# Altium PCB RbMotor_ECAT_RevB+.PcbDoc (part 3 of 4)
Units mm, origin at the board's own origin, x right, y up, seen from the top; angles counter-clockwise.
Board outline 58 x 58 mm, 4 copper layers (F.Cu, In1.Cu, In2.Cu, B.Cu); 285 components, 277 nets, 865 pads, 722 vias.
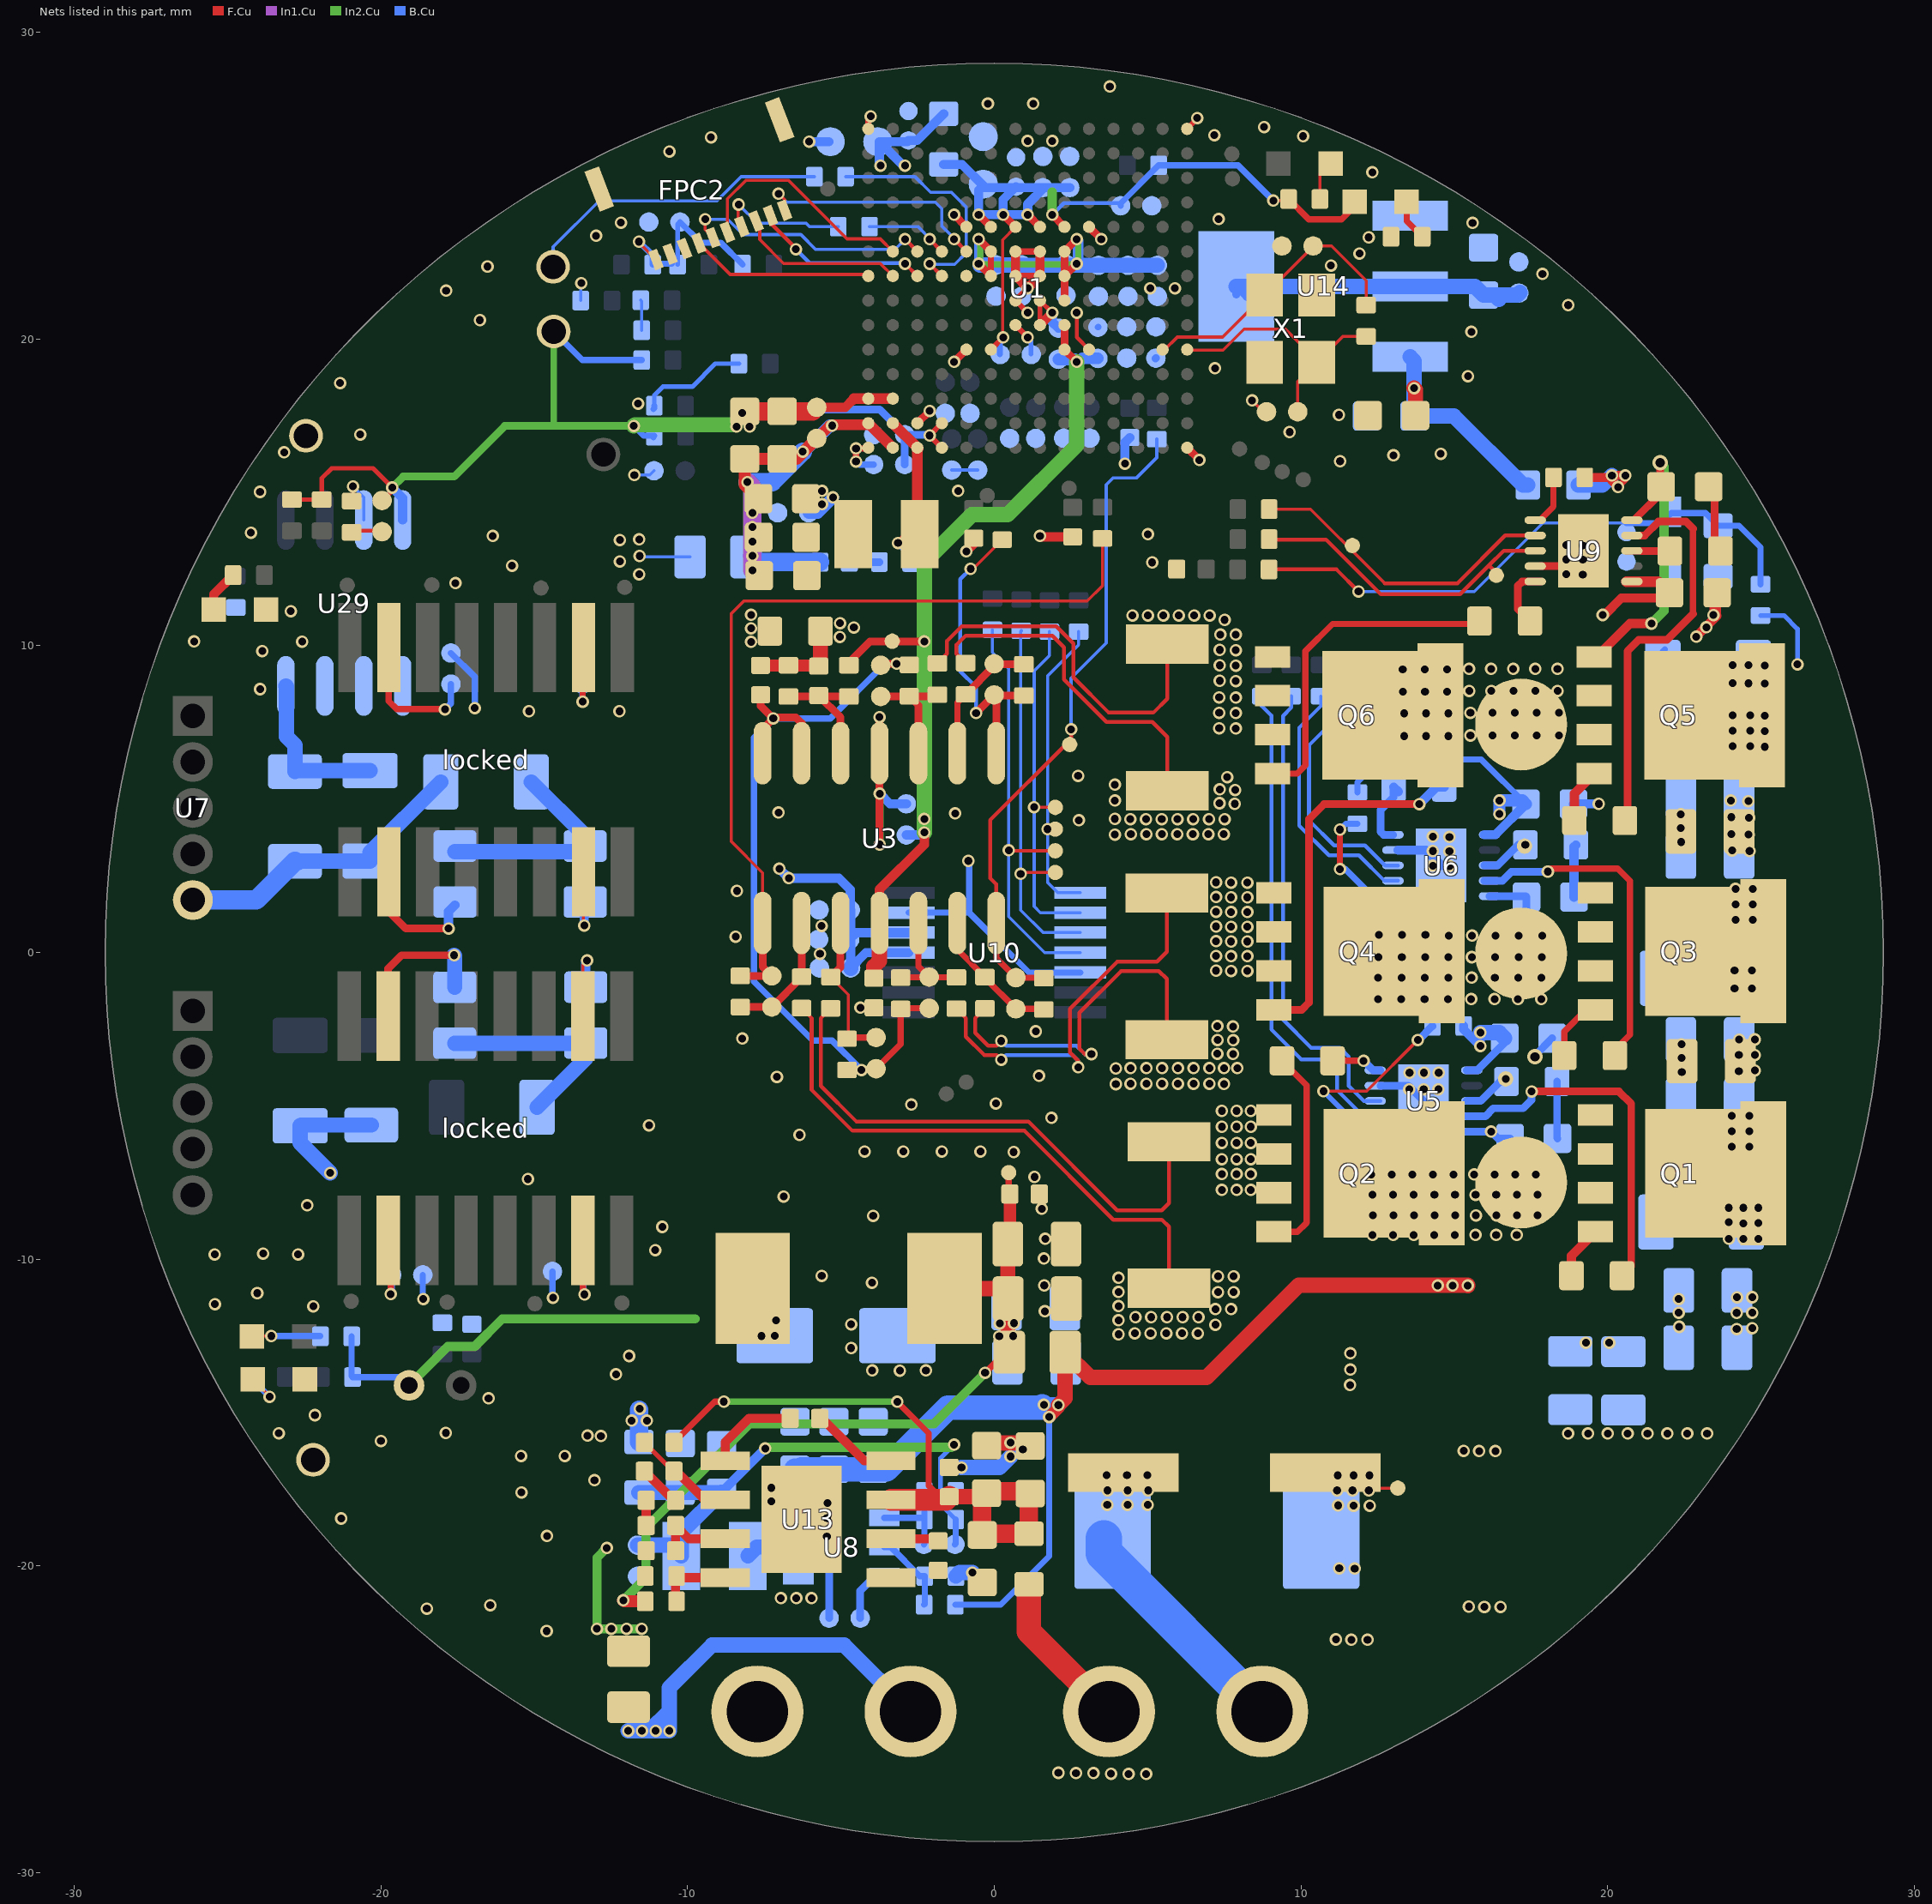
[diagram p4: the nets of this part, all layers, seen from the top]

## Via types
v1: diameter 0.406, hole 0.254, F.Cu to B.Cu, tented both sides, 720 vias
v2: diameter 0.5, hole 0.3, F.Cu to B.Cu, tented both sides, 2 vias

## Nets (pads, with @x,y where several pads share a name; then routed paths per layer and width w, separated by ;. In a path a pad name is that pad's centre, name@x,y a point inside that pad or via, vN(x,y) a via of type N, cw(c..) or ccw(c..) an arc to the next point about the centre after c; other vN are vias at no path point) (continued)
Net-(C27-Pad2): (continued)
  F.Cu w0.127: U3.7@0.065,0.958 0.065,2.225 -0.13,2.42 -0.13,4.32 2.33,6.78 TP14.1@2.46,6.78 2.505,6.825 v1(2.505,7.276)
  F.Cu w0.2: 0.065,-0.184 U3.7@0.065,0.958 ; C27.2@0.705,-0.824 R24.2@1.597,-0.824
  F.Cu w0.203: 0.065,-0.184 C27.2@0.705,-0.824
  B.Cu w0.102: v1(2.505,7.276) 2.505,8.945 3.65,10.09 3.65,15.25 3.87,15.47 4.63,15.47 5.3,16.14 R35.1@5.3,16.74
Net-(C28-Pad1): C28.1 R13.2 R27.1 U3.9 | length 4.4
  F.Cu w0.203: U3.9@-1.205,6.496 -1.205,8.146 R13.2@-0.935,8.416
  F.Cu w0.25: R13.2@-0.935,8.416 -0.005,9.346 C28.1@-0.005,9.414 0.013,9.396 R27.1@0.965,9.396
Net-(C28-Pad2): C28.2 R27.2 R36.1 U3.8 | length 10.4
  F.Cu w0.102: v1(-0.77,12.51) -0.69,12.51 R36.1@0.26,13.46
  F.Cu w0.127: R36.1@0.13,13.33 R36.1@0.26,13.46
  F.Cu w0.25: v1(-0.595,7.806) C28.2@-0.005,8.398 C28.2@-0.005,8.398 ; U3.8@0.065,6.496 0.065,8.328 C28.2@-0.005,8.398 ; R27.2@0.965,8.376 0.017,8.376 C28.2@-0.005,8.398
  B.Cu w0.127: v1(-0.77,12.51) -1.11,12.17 -1.11,9.17 -0.595,8.655 v1(-0.595,7.806)
Net-(C29-Pad1): C29.1 C30.1 C31.1 C51.1 R29.1 R31.1 R33.1 U3.13 U3.14 | length 28.5
  F.Cu w0.2: R29.1@-4.805,-3.834 v1(-4.33,-3.834) C29.1@-3.897,-3.834 ; C29.1@-3.855,-3.792 -3.055,-2.992 R31.1@-3.055,-1.842 -3.033,-1.82 C30.1@-2.125,-1.82
  F.Cu w0.203: C29.1@-3.897,-3.834 C29.1@-3.855,-3.792
  F.Cu w0.25: C51.1@-7.625,8.398 -7.625,8.045 ; C51.1@-7.625,8.437 -7.625,8.045 ; U3.14@-7.555,6.496 -7.555,7.285 v1(-7.21,7.63) ; U3.13@-6.285,6.496 -6.285,7.476 -6.469,7.66 -7.18,7.66 v1(-7.21,7.63) ; C31.1@-3.705,9.364 C31.1@-3.653,9.416 ; v1(-3.185,9.416) C31.1@-3.653,9.416 ; R33.1@-2.775,9.376 -2.815,9.416 C31.1@-3.653,9.416 ; -7.625,8.045 v1(-7.21,7.63)
  B.Cu w0.203: v1(-4.33,-3.834) -5.291,-2.873 -5.5,-2.873 -5.916,-2.873 -7.835,-0.954 -7.835,7.005 v1(-7.21,7.63) -5.35,7.63 -3.564,9.416 v1(-3.185,9.416)
Net-(C29-Pad2): C29.2 R9.2 R29.2 U3.3 | length 5.1
  F.Cu w0.102: R9.2@-5.335,-0.804 -4.765,-1.374 R29.2@-4.765,-2.774
  F.Cu w0.2: R29.2@-4.765,-2.774 R29.2@-4.805,-2.814 -4.767,-2.776 C29.2@-3.855,-2.776
  F.Cu w0.25: R9.2@-5.335,-0.804 -5.015,-0.484 U3.3@-5.015,0.958
Net-(C30-Pad2): C30.2 R12.2 R31.2 U3.5 | length 3.7
  F.Cu w0.2: R31.2@-3.055,-0.822 -3.047,-0.814 R12.2@-1.235,-0.814 ; U3.5@-2.475,0.958 -2.475,-0.454 C30.2@-2.125,-0.804
Net-(C31-Pad2): C31.2 R16.2 R33.2 U3.10 | length 3.9
  F.Cu w0.25: C31.2@-3.705,8.348 -1.913,8.348 R16.2@-1.855,8.406 ; R33.2@-2.775,8.356 -2.475,8.056 U3.10@-2.475,6.496
Net-(C46-Pad2): C46.2 locked.2@-13.4,9.944 | length 2.4
  F.Cu w0.203: v1(-13.425,8.176) -13.425,9.919 locked.2@-13.4,9.944
  B.Cu w0.203: C46.2@-13.435,8.748 -13.435,8.186 v1(-13.425,8.176)
Net-(C47-Pad2): C47.2 locked.7@-19.75,9.944 | length 4.6
  F.Cu w0.203: locked.7@-19.75,9.944 -19.75,8.196 -19.49,7.936 -17.925,7.936 v1(-17.915,7.926)
  B.Cu w0.203: v1(-17.915,7.926) -17.725,8.116 C47.2@-17.725,8.748
Net-(C53-Pad2): C53.2 R92.2 | length 1.9
  B.Cu w0.25: R92.2@18.355,-4.21 18.355,-6.049 C53.2@18.37,-6.064
Net-(C57-Pad1): C57.1 R37.1 R38.2 U3.12 | length 4.1
  F.Cu w0.25: R38.2@-6.715,8.346 R37.1@-4.745,8.346 ; C57.1@-5.725,8.376 -5.015,7.666 U3.12@-5.015,6.496
Net-(C63-Pad2): C63.2 R72.2 | length 2.3
  F.Cu w0.25: C63.2@23.3,15.186 23.495,14.991 23.495,13.28 R72.2@23.685,13.09
Net-(C78-Pad2): C78.2 C79.1 C80.1 C81.1 FB1.2 L3.2 R67.2 | length 18.8
  In2.Cu w0.3: v1(-7.47,-16.175) -7.435,-16.14 -1.4,-16.14 v1(-1.31,-16.05)
  B.Cu w0.15: v1(-1.31,-16.05) -1.75,-16.49 -1.75,-18.005 R67.2@-1.26,-18.495
  B.Cu w0.2: C78.2@-1.282,-19.305 -1.26,-19.283 R67.2@-1.26,-18.495
  B.Cu w0.3: C79.1@-8.9,-17.605 v1(-7.47,-16.175)
  B.Cu w0.5: C81.1@-11.64,-19.33 -10.555,-19.33 L3.2@-10.205,-19.68 -10.205,-18.91 C79.1@-8.9,-17.605 -8.91,-17.615 FB1.2@-11.59,-17.615
Net-(C91-Pad1): C91.1 R86.1 | length 0.8
  F.Cu w0.3: R86.1@-11.354,-18.69 C91.1@-11.354,-17.866
Net-(C101-Pad1): C43.1 C50.1 C85.1 C101.1 C116.1 FB5.1 U1.E6 U1.E7 U1.E8 U1.K6 | length 15.9
  F.Cu w0.102: v1@0.27,20.04 0.27,23.24 U1.E7@0.69,23.66
  F.Cu w0.178: U1.K6@-0.11,19.66 v1(0.29,20.06)
  F.Cu w0.254: v1(-0.51,24.06) U1.E6@-0.11,23.66 ; v1(0.29,24.06) U1.E7@0.69,23.66 ; v1(1.09,24.06) U1.E8@1.49,23.66
  B.Cu w0.203: C85.1@0.18,19.51 0.18,19.95 v1(0.29,20.06)
  B.Cu w0.3: FB5.1@-1.65,25.7 -1.058,25.7 C43.1@-0.36,25.002 ; v1(0.29,24.06) 0.29,24.55 C101.1@0.71,24.97 ; C116.1@1.63,24.942 1.09,24.402 v1(1.09,24.06) v1(-0.51,24.06) -0.51,24.852 C43.1@-0.36,25.002 ; C50.1@2.46,24.942 -0.3,24.942 C43.1@-0.36,25.002
Net-(C117-Pad1): C117.1 R22.2 | length 1
  B.Cu w0.254: C117.1@-4.73,12.73 R22.2@-3.75,12.73
Net-(D6-K): C68.2 D6.1 L2.1 U13.1 | length 3.7
  F.Cu w0.102: U13.1@-8.773,-16.581 U13.1@-8.111,-16.581
  F.Cu w0.3: U13.1@-8.773,-16.581 -8.773,-15.973 -7.996,-15.196 C68.2@-6.654,-15.196
  other v1: -7.59,-12.51 -7.16,-12.5 -7.12,-12
Net-(D10-C): C66.1 D10.1 R48.1 R79.1 R87.2 | length 19.1
  F.Cu w0.127: R48.1@8.96,12.49 11.16,12.49 v1(11.88,11.77)
  B.Cu w0.102: v1(11.88,11.77) 15.66,11.77 17.893,14.002 C66.1@20.62,14.002
  B.Cu w0.2: C66.1@20.62,14.002 21.755,14.002 22.08,14.327 23.197,14.327 R87.2@23.61,13.915 24.295,13.915 24.995,13.215 R79.1@24.995,12.006
Net-(LED1-K): LED1.1 R8.2 | length 1.4
  F.Cu w0.203: LED1.1@13.451,24.48 13.451,23.849 R8.2@13.96,23.34
Net-(LED2-A): LED2.2 R60.1 | length 2.2
  F.Cu w0.102: LED2.2@-24.212,-12.52 -24.202,-12.51 v1(-23.58,-12.51)
  B.Cu w0.102: R60.1@-21.99,-12.51 R60.1@-21.98,-12.52
  B.Cu w0.2: v1(-23.58,-12.51) R60.1@-21.99,-12.51
Net-(LED3-A): LED3.2 R40.1 | length 1.7
  F.Cu w0.102: LED3.2@-25.637,10.876 LED3.2@-25.637,11.136
  F.Cu w0.3: LED3.2@-25.456,11.176 -25.456,11.676 R40.1@-24.826,12.306
Net-(LED4-A): LED4.2 R47.2 | length 1.3
  F.Cu w0.102: R47.2@10.62,24.57 10.62,25.369 LED4.2@10.971,25.72
Net-(LED5-A): LED5.2 R39.1 | length 1.7
  F.Cu w0.102: LED5.2@-24.191,-13.92 -23.64,-14.471 v1(-23.64,-14.49)
  B.Cu w0.2: R39.1@-24.15,-13.84 -24.15,-13.98 v1(-23.64,-14.49)
Net-(Q1-G): Q1.4 R53.2 | length 1.9
  F.Cu w0.3: R53.2@18.825,-10.54 18.825,-9.893 Q1.4@19.61,-9.109 Q1.4@19.49,-9.229
Net-(Q2-G): Q2.4 R54.2 | length 6.8
  F.Cu w0.203: Q2.4@9.12,-9.109 9.89,-9.109 10.185,-8.814 10.185,-4.334 R54.2@9.385,-3.534
Net-(Q3-G): Q3.4 R15.2 | length 2.4
  F.Cu w0.102: Q3.4@19.61,-1.869 Q3.4@19.8,-2.059
  F.Cu w0.203: R15.2@18.59,-3.364 18.59,-2.579 19.3,-1.869 Q3.4@19.61,-1.869
  F.Cu w0.3: Q3.4@19.61,-1.869 Q3.4@19.63,-1.869
Net-(Q4-G): Q4.4 R50.2 | length 12.1
  F.Cu w0.25: Q4.4@9.12,-1.869 10.03,-1.869 10.265,-1.634 10.265,4.346 10.755,4.836 v1(13.865,4.836)
  B.Cu w0.3: v1(13.865,4.836) 14.418,5.39 R50.2@14.675,5.39
Net-(Q5-G): Q5.4 R71.2 | length 1.8
  F.Cu w0.3: R71.2@18.92,4.3 18.92,5.181 Q5.4@19.57,5.831
Net-(Q6-G): Q6.4 R76.2 | length 11.1
  F.Cu w0.102: Q6.4@9.01,5.761 Q6.4@9.08,5.831
  F.Cu w0.2: Q6.4@9.08,5.831 9.88,5.831 10.145,6.096 10.145,9.826 11.035,10.716 15.73,10.716 R76.2@15.82,10.806
Net-(R4-Pad2): locked.10@-13.42,-2.076 R4.2 | length 2.8
  F.Cu w0.102: locked.10@-13.42,-2.076 -13.42,-0.399 v1(-13.285,-0.264)
  B.Cu w0.3: R4.2@-13.325,-1.219 -13.325,-0.304 v1(-13.285,-0.264)
Net-(R5-Pad2): locked.15@-19.77,-2.076 R5.2 | length 4.9
  F.Cu w0.25: locked.15@-19.77,-2.076 -19.77,-0.53 -19.33,-0.09 v1(-17.62,-0.09)
  B.Cu w0.5: v1(-17.62,-0.09) -17.6,-0.11 R5.2@-17.6,-1.138
Net-(R17-Pad2): locked.10@-19.75,2.629 R17.2 | length 4.3
  F.Cu w0.25: locked.10@-19.75,2.629 -19.75,1.34 -19.19,0.78 v1(-17.8,0.78)
  B.Cu w0.3: v1(-17.8,0.78) -17.8,1.335 R17.2@-17.59,1.545
Net-(R18-Pad2): locked.15@-13.4,2.629 R18.2 | length 2.6
  F.Cu w0.102: locked.15@-13.4,2.629 -13.4,0.901 v1(-13.375,0.876)
  B.Cu w0.3: v1(-13.375,0.876) -13.375,1.701 R18.2@-13.345,1.731
Net-(R75-Pad1): R75.1 TP7.1 | length 10.1
  B.Cu w0.102: TP7.1@-14.39,22.36 -14.39,23.01 -12.89,24.51 -9.05,24.51 -8.26,25.3 R75.1@-5.87,25.3
Net-(U1C-XTALI): C37.1 R14.2 U1.K14 X1.3 | length 8.8
  F.Cu w0.102: U1.K14@6.34,19.64 7.462,19.64 8.145,20.324 9.495,20.324 10.518,19.301 X1.3@10.518,19.24 ; C37.1@9.896,17.63 9.896,18.618 X1.3@10.518,19.24 ; R14.2@12.13,20.09 11.368,20.09 X1.3@10.518,19.24
Net-(U1C-XTALO): C38.1 R14.1 U1.K13 X1.1 | length 9.3
  F.Cu w0.102: U1.K13@5.54,19.64 5.97,20.07 7.448,20.07 X1.1@8.818,21.44 10.398,23.02 C38.1@10.398,23.04 11,23.04 12.13,21.91 R14.1@12.13,21.11
Net-(U5-BST): R92.1 TP17.1 U5.3 | length 1.6
  B.Cu w0.25: U5.3@15.407,-4.844 15.865,-4.844 16.498,-4.21 R92.1@16.705,-4.21
  other v1: 16.68,-4.124
Net-(U5-DRVH): R53.1 U5.4 | length 11.8
  F.Cu w0.25: v1(17.525,-4.534) 20.375,-4.534 20.775,-4.934 20.775,-10.24 R53.1@20.475,-10.54
  B.Cu w0.25: U5.4@15.407,-5.344 16.015,-5.344 16.275,-5.084 17.246,-5.084 17.525,-4.805 v1(17.525,-4.534)
Net-(U5-DRVL): R54.1 U5.10 | length 1.7
  F.Cu w0.203: R54.1@11.035,-3.534 v1(12.045,-3.534)
  B.Cu w0.25: v1(12.045,-3.534) 12.355,-3.844 U5.10@12.593,-3.844
Net-(U5-EN): R20.2 U5.6 | length 6.8
  F.Cu w0.102: v1(10.735,-4.524) 12.145,-4.524 v1(13.815,-2.854)
  B.Cu w0.17: v1(10.735,-4.524) 12.055,-5.844 U5.6@12.593,-5.844
  B.Cu w0.25: v1(13.815,-2.854) 13.836,-2.854 R20.2@14.29,-2.4
Net-(U5-INH): R58.2 U5.7 | length 16.2
  B.Cu w0.127: R58.2@8.725,8.356 8.725,8.036 9.035,7.726 9.035,-2.514 10.005,-3.484 10.925,-3.484 11.175,-3.734 11.175,-4.484 12.035,-5.344 U5.7@12.593,-5.344
Net-(U5-INL): R63.2 U5.8 | length 15.5
  B.Cu w0.127: R63.2@9.685,8.356 9.685,7.986 9.415,7.716 9.415,-2.194 10.335,-3.114 11.275,-3.114 11.565,-3.404 11.565,-4.354 12.055,-4.844 U5.8@12.593,-4.844
Net-(U6-BST): R46.1 TP16.1 U6.3 | length 1.6
  B.Cu w0.25: U6.3@15.985,2.836 16.415,2.836 17.085,3.506 v1(17.32,3.506)
Net-(U6-DRVH): R15.1 U6.4 | length 11
  F.Cu w0.203: v1(18.055,2.636) 18.155,2.736 20.335,2.736 20.735,2.336 20.735,-2.684 20.24,-3.179 R15.1@20.24,-3.364
  B.Cu w0.25: U6.4@15.985,2.336 16.575,2.336 16.865,2.626 17.695,2.626 18.045,2.626 v1(18.055,2.636)
Net-(U6-DRVL): R50.1 U6.10 | length 2.3
  B.Cu w0.25: U6.10@13.003,3.837 12.703,3.837 12.6,3.94 12.6,4.64 13.025,5.065 R50.1@13.025,5.39
  B.Cu w0.3: R50.1@13.025,5.39 R50.1@13.171,5.244
Net-(U6-EN): R19.2 U6.6 | length 4.2
  F.Cu w0.203: v1(11.275,2.716) v1(11.275,4.006)
  B.Cu w0.203: v1(11.275,2.716) 11.445,2.716 12.325,1.836 U6.6@13.171,1.836 ; v1(11.275,4.006) 11.465,4.196 R19.2@11.845,4.196
Net-(U6-INH): R64.2 U6.7 | length 8.5
  B.Cu w0.102: 9.945,4.136 9.945,7.326 10.645,8.026 R64.2@10.645,8.356
  B.Cu w0.127: 9.945,4.136 10.915,3.166 11.895,3.166 12.725,2.336 U6.7@13.171,2.336
Net-(U6-INL): R65.2 U6.8 | length 8.1
  B.Cu w0.127: R65.2@11.605,8.356 11.605,8.096 10.265,6.756 10.265,4.306 11.085,3.486 12.095,3.486 12.745,2.836 U6.8@13.171,2.836
Net-(U8-EN): R26.1 R42.1 U8.5 | length 2.7
  B.Cu w0.2: U8.5@-3.59,-19.39 -3.38,-19.39 -2.43,-20.34 R42.1@-2.27,-20.34 -2.27,-21.25 R26.1@-2.29,-21.27
Net-(U8-SW): C72.2 L3.1 U8.2 | length 4.9
  B.Cu w0.102: U8.2@-6.525,-19.525 U8.2@-6.39,-19.39
  B.Cu w0.25: U8.2@-6.39,-19.39 -6.08,-19.39 -5.388,-20.082 C72.2@-5.388,-21.71
  B.Cu w0.5: L3.1@-8.035,-19.68 -7.745,-19.39 U8.2@-6.39,-19.39
Net-(U8-VBST): C72.1 U8.6 | length 1.9
  B.Cu w0.25: C72.1@-4.372,-21.71 -4.372,-20.822 -3.89,-20.34 U8.6@-3.59,-20.34
Net-(U8-VFB): C78.1 R67.1 R70.2 U8.4 | length 3.1
  B.Cu w0.2: U8.4@-3.59,-18.44 -2.335,-18.44 R67.1@-2.28,-18.495 ; C78.1@-2.298,-19.305 -2.28,-19.287 R70.2@-2.28,-17.595
Net-(U9-BST): R72.1 U9.3 | length 2.7
  F.Cu w0.25: U9.3@20.625,13.096 21.105,13.096 21.111,13.09 R72.1@22.035,13.09 22.029,13.096 U9.3@20.793,13.096
Net-(U9-DRVH): R71.1 U9.4 | length 13.5
  F.Cu w0.2: 22.644,10.896 22.715,10.966 ; 22.79,11.042 22.79,13.82
  F.Cu w0.25: R71.1@20.57,4.3 20.65,4.381 20.65,9.822 21.025,10.196 21.945,10.196 22.644,10.896 22.79,11.042 ; U9.4@20.625,13.596 21.215,13.596 21.668,14.05 22.56,14.05 22.79,13.82
Net-(U9-DRVL): R76.1 U9.10 | length 2.1
  F.Cu w0.25: R76.1@17.47,10.806 17.08,11.196 17.08,11.96 17.216,12.096 U9.10@17.643,12.096 ; U9.10@17.645,12.096 U9.10@17.811,12.096
Net-(U9-EN): R30.2 U9.6 | length 1.8
  F.Cu w0.2: U9.6@17.643,14.096 17.796,14.096 18.24,14.54 R30.2@18.24,15.49 R30.2@18.21,15.46
Net-(U9-INH): R66.2 TP10.1 U9.7 | length 10.5
  F.Cu w0.102: R66.2@8.965,14.456 10.315,14.456 12.241,12.531 12.731,12.04
  F.Cu w0.127: 12.731,12.04 15.108,12.04 16.665,13.596 U9.7@17.811,13.596
Net-(U9-INL): R68.2 TP11.1 U9.8 | length 10.6
  F.Cu w0.127: R68.2@8.975,13.466 10.815,13.466 12.601,11.68 15.198,11.68 16.135,12.616 ; TP11.1@16.375,12.296 16.375,12.376 16.135,12.616 ; U9.8@17.811,13.096 16.615,13.096 16.135,12.616
Net-(U13-BST): C68.1 U13.8 | length 2.9
  F.Cu w0.3: C68.1@-5.694,-15.196 -5.624,-15.196 -4.239,-16.581 U13.8@-3.373,-16.581
Net-(U13-COMP): C90.1 R86.2 U13.3 | length 2.6
  F.Cu w0.3: C90.1@-10.394,-19.513 R86.2@-10.394,-18.69 -9.962,-19.121 U13.3@-8.773,-19.121
Net-(U13-EN): R82.1 R83.2 U13.2 | length 3.3
  F.Cu w0.15: R82.1@-11.41,-15.98 R83.2@-10.474,-16.916
  F.Cu w0.2: R83.2@-10.474,-16.916 R83.2@-10.45,-16.916
  F.Cu w0.3: R83.2@-10.384,-16.91 -9.442,-17.851 U13.2@-8.773,-17.851
Net-(U13-FB): R80.1 R84.2 U13.4 | length 2.5
  F.Cu w0.3: R80.1@-10.394,-21.16 -10.394,-20.336 -10.339,-20.391 U13.4@-8.773,-20.391
Net-(U13-RT): R85.2 U13.6 | length 1.6
  F.Cu w0.3: U13.6@-3.373,-19.121 -1.899,-19.121 R85.2@-1.83,-19.19
Net-(U13-VIN): C71.2 C75.1 C76.1 C102.1 FB4.1 R82.2 U13.7 | length 20.6
  F.Cu w0.2: R82.2@-10.45,-15.98 -9.12,-14.65 v1(-8.82,-14.65) ; v1(-3.165,-14.655) -2.14,-15.68 -2.14,-17.392 -1.78,-17.752 C71.2@-1.47,-17.752
  F.Cu w0.5: C71.2@-1.47,-17.752 -0.367,-17.752 C76.1@-0.25,-17.635
  F.Cu w0.6: C76.1@-0.25,-17.635 -0.393,-17.778 C102.1@-0.393,-18.996 -0.351,-18.955 FB4.1@1.13,-18.955 1.13,-17.685 C75.1@1.17,-17.645 1.1,-17.575 C76.1@-0.07,-17.575
  F.Cu w0.7: U13.7@-3.373,-17.851 -1.569,-17.851 C71.2@-1.47,-17.752
  In2.Cu w0.2: v1(-8.82,-14.65) -3.17,-14.65 v1(-3.165,-14.655)
Net-(U14-VIN): C95.1 C109.1 FB3.2 U14.3 | length 7.5
  F.Cu w0.5: v1(13.695,18.4) 13.74,18.355 C95.1@13.74,17.51
  B.Cu w0.5: U14.3@13.565,19.42 13.695,19.29 v1(13.695,18.4) C109.1@13.695,17.49 14.99,17.49 17.24,15.24 FB3.2@17.4,15.24
Net-(U29-{\W\C\}\)\: R128.1 U29.7 | length 1.7
  F.Cu w0.102: R128.1@-20.96,14.72 -20.92,14.76 v1(-20.92,15.2)
  B.Cu w0.102: v1(-20.92,15.2) -20.567,14.847 U29.7@-20.567,14.101
PA0: FPC2.3 U1.G2 | length 5.5
  F.Cu w0.102: FPC2.3@-7.77,23.85 -7.65,23.73 -7.65,23.25 -6.87,22.47 -3.72,22.47 U1.G2@-3.31,22.06
PA1: FPC2.2 U1.G3 | length 5.8
  F.Cu w0.127: FPC2.2@-7.303,24.029 -7.303,23.793 -6.47,22.96 v1(-6.47,22.93) ; v1(-2.91,22.46) U1.G3@-2.51,22.06
  B.Cu w0.127: v1(-6.47,22.93) -6.02,22.48 -2.93,22.48 v1(-2.91,22.46)
PA2: R75.2 U1.G4 | length 7.7
  F.Cu w0.127: v1(-2.11,22.46) U1.G4@-1.71,22.06
  B.Cu w0.102: R75.2@-4.85,25.3 -2.59,25.3 -2.08,24.79 -1.4,24.79 -0.92,24.31 -0.92,22.81 -1.29,22.44 v1@-2.06,22.44
PA3: U1.G5
PA6: R41.2 U1.F4 | length 2.8
  F.Cu w0.127: v1(-2.11,23.26) U1.F4@-1.71,22.86
  B.Cu w0.102: R41.2@-4.07,23.67 -2.49,23.67 v1@-2.06,23.24